# Altium PCB D23.PcbDoc
Units mm, origin at the board's own origin, x right, y up, seen from the top; angles counter-clockwise.
Board outline 105.92 x 67.69 mm, 2 copper layers (Top Layer, Bottom Layer); 23 components, 37 nets, 113 pads, 0 vias.
Unrouted connection lines stored in the file: 5.
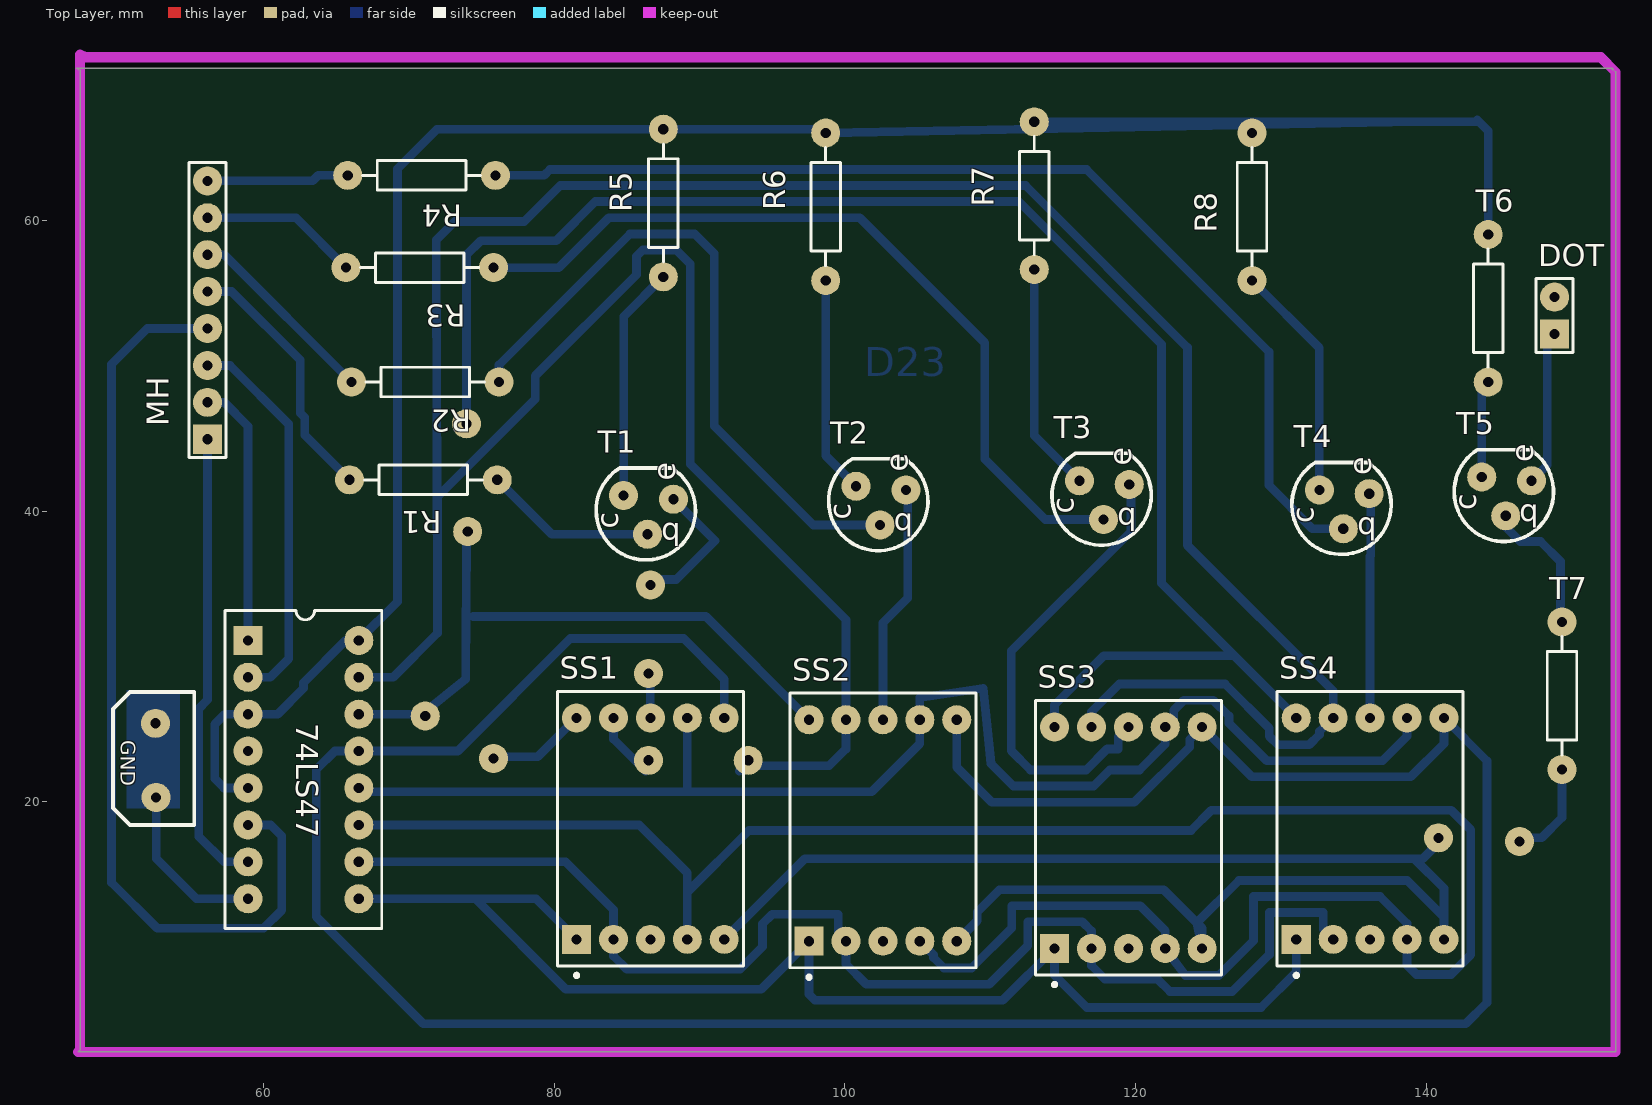
[diagram p0: Top Layer view]
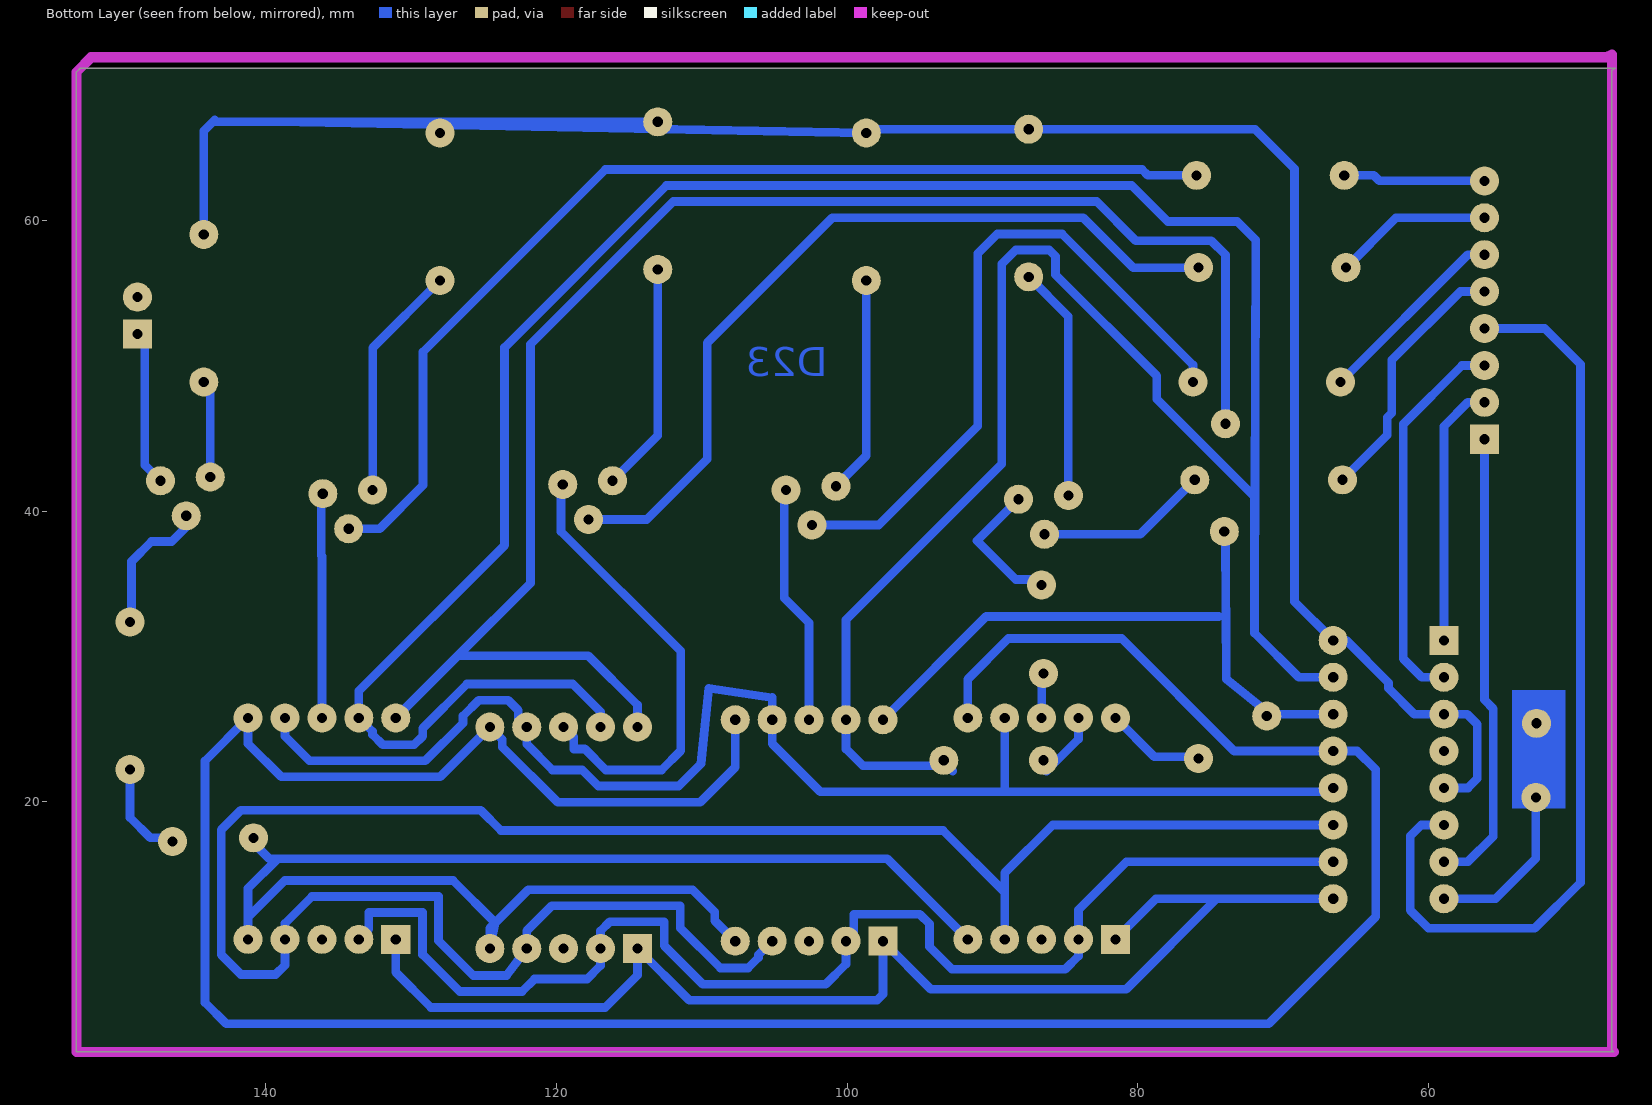
[diagram p1: Bottom Layer view, seen from below]

## Layer stack, top to bottom
Top Layer: signal copper 0.0356
Dielectric: dielectric 0.32, FR-4, Dk 4.8
Bottom Layer: signal copper 0.0356

## Board outline
47.371,70.358 47.371,2.921 47.244,2.794 153.035,2.794 153.035,70.231 152.781,70.485 47.117,70.485

## Design rules (kind name [scope] priority, off if disabled: settings)
Clearance [All] p1: gap=0.5
HoleSize [All] p1: absolutevalues=TRUE maxlimit=0.5 minlimit=0.5 maxpercent=80.000 minpercent=20.000
PolygonConnect [All] p1: connectstyle=Relief reliefconductorwidth=0.254 reliefentries=4 polygonreliefangle="90 Angle"
RoutingVias [All] p1: holewidth=0.711 width=1.27 viastyle="Through Hole" minholewidth=0.711 minwidth=1.27 maxholewidth=0.711 maxwidth=1.27
ShortCircuit [All] p1 off: allowed=FALSE
SilkscreenOverComponentPads [All] p1: minsilkscreentomaskgap=0.254
SolderMaskExpansion [All] p1: expansion=0.102
Width [All] p1: maxlimit=0.6 minlimit=0.6 preferedwidth=0.6
25 further rules are at their usual default settings.

## Components (designator, comment, footprint, x,y, rotation, side; value= is the part's Value field where it differs from the comment)
74LS47 "Comment" DIP-16-KEY 58.928,31.115 r270 top locked
DOT "Comment" HDR1X2 148.844,52.197 r90 top
MH "Comment" HDR1X8 56.134,44.958 r90 top
R1 "Comment" AXIAL-0.4#1 70.993,42.164 r180 top
R2 "Comment" AXIAL-0.4#1 71.12,48.895 r180 top
R3 "Comment" AXIAL-0.4#1 70.739,56.769 r180 top
R4 "Comment" AXIAL-0.4#1 70.866,63.119 r180 top
R5 "Comment" AXIAL-0.4#1 87.503,61.214 r90 top
R6 "Comment" AXIAL-0.4#1 98.679,60.96 r90 top
R7 "Comment" AXIAL-0.4#1 113.03,61.722 r90 top
R8 "Comment" AXIAL-0.4#1 128.016,60.96 r90 top
SS1 "" H 86.614,18.161 r0 top
SS2 "Comment" H 102.616,18.034 r0 top
SS3 "Comment" H 119.507,17.526 r0 top
SS4 "Comment" H 136.144,18.161 r0 top
T1 "Comment" "TO-92 Packaging" 86.487,39.751 r90 top
T2 "Comment" "TO-92 Packaging" 102.489,40.386 r90 top
T3 "Comment" "TO-92 Packaging" 117.856,40.767 r90 top
T4 "Comment" "TO-92 Packaging" 134.366,40.132 r90 top
T5 "Comment" "TO-92 Packaging" 145.542,41.021 r90 top
T6 "Comment" AXIAL-0.4#2 144.272,53.975 r90 top
T7 "Comment" AXIAL-0.4#2 149.352,27.305 r90 top
? "Comment" "PCB Block Connector" 52.578,22.86 r270 top

## Footprints (in the part's own frame and the unit in brackets; to place one, negate y for a bottom-side part, rotate by r counter-clockwise, add the part's x,y. Pads: shape width x height; smd on the part's side, far side on the other; paste and mask are expansions set on the pad)
AXIAL-0.4#1 [mm] "Axial Device, Thru-Hole; 2 Leads; 0.4 in Pin Spacing"
  round 2 hole 0.7: 2.1(-5.08,0) 2.1(5.08,0)
  silkscreen extent -4.06,-1.02 4.06,1.02
AXIAL-0.4#2 [mm] "Axial Device, Thru-Hole; 2 Leads; 0.4 in Pin Spacing"
  round 2 hole 0.7: 1(-5.08,0) 2(5.08,0)
  silkscreen extent -4.06,-1.02 4.06,1.02
DIP-16-KEY [mm] "DIP; 16 Leads; Row Spacing 7.62 mm; Pitch 2.54 mm"
  round 2 hole 0.7: 2.1(0,7.62) 2.1(2.54,7.62) 2.1(2.54,0) 2.1(5.08,7.62) 2.1(5.08,0) 2.1(7.62,7.62) 2.1(7.62,0) 2.1(10.16,7.62) 2.1(10.16,0) 2.1(12.7,7.62) 2.1(12.7,0) 2.1(15.24,0) 2.1(15.24,7.62) 2.1(17.78,0) 2.1(17.78,7.62)
  rect 2x2 hole 0.7: 2.1(0,0)
  silkscreen extent -2.05,-1.59 19.83,9.2
H [mm] "LED, 7-Segment Display, 14.2 mm, RHD; 10 Leads; Row Space 15.24 mm; Pitch 2.54 mm"
  rect 2x2 hole 0.7: 2.1(-5.08,-7.62)
  round 2 hole 0.7: 2.1(-5.08,7.62) 2.1(-2.54,-7.62) 2.1(-2.54,7.62) 2.1(0,-7.62) 2.1(0,7.62) 2.1(2.54,-7.62) 2.1(2.54,7.62) 2.1(5.08,-7.62) 2.1(5.08,7.62)
  silkscreen extent -6.4,-10.22 6.4,9.45, body extent -6.4,-9.45 6.4,9.45, height 8.25
HDR1X2 [mm] "Connector; Header; 2 Position"
  rect 2x2 hole 0.7: 1(0,0)
  round 2 hole 0.7: 2(2.54,0)
  silkscreen extent -1.27,-1.27 3.81,1.27
HDR1X8 [mm] "Connector; Header; 8 Position"
  rect 2x2 hole 0.7: 2.1(0,0)
  round 2 hole 0.7: 2.1(2.54,0) 2.1(5.08,0) 2.1(7.62,0) 2.1(10.16,0) 2.1(12.7,0) 2.1(15.24,0) 2.1(17.78,0)
  silkscreen extent -1.27,-1.27 19.05,1.27
"PCB Block Connector" [mm]
  round 2 hole 0.7: 2.1(-2.547,-0.023) 2.1(2.547,0.023)
  silkscreen extent -4.7,-2.94 4.44,2.65
"TO-92 Packaging" [mm] "for 2N3904"
  round 2 hole 0.7: T(-1.333,0.063) T(1.08,-1.714) T(1.333,1.714)
  silkscreen extent -3.1,-3.23 3.22,3.61

## Part data
MH: library part "Header 8"
R1 R2 R3 R4 R5 R6 R7 R8: library part Res2
SS1 SS2 SS3 SS4: library part "Dpy Blue-CA"

## Free pads (board coordinates)
  round 2 hole 0.7: 0(86.487,22.86) 0(140.843,17.526) 1(93.345,22.86) 1(146.431,17.272) 2(86.487,28.829) 3(86.614,34.925) 4(73.965,46.025) 5(74.041,38.608) 6(71.12,25.908) 7(75.819,22.987)

## Nets (pads, with @x,y where several pads share a name; then routed paths per layer and width w, separated by ;. In a path a pad name is that pad's centre, name@x,y a point inside that pad or via, vN(x,y) a via of type N, cw(c..) or ccw(c..) an arc to the next point about the centre after c; other vN are vias at no path point)
1: MH.2.1@56.134,55.118 R1.2.1@65.913,42.164 | length 18
  Bottom Layer w0.6: MH.2.1@56.134,55.118 57.81,55.118 62.517,50.412 62.517,46.76 62.822,46.455 62.822,45.255 R1.2.1@65.913,42.164
2: MH.2.1@56.134,57.658 R2.2.1@66.04,48.895 | length 13.5
  Bottom Layer w0.6: MH.2.1@56.134,57.658 57.277,57.658 R2.2.1@66.04,48.895
3: MH.2.1@56.134,60.198 R3.2.1@65.659,56.769 | length 10.9
  Bottom Layer w0.6: MH.2.1@56.134,60.198 62.23,60.198 R3.2.1@65.659,56.769
4: MH.2.1@56.134,62.738 R4.2.1@65.786,63.119 | length 9.8
  Bottom Layer w0.6: MH.2.1@56.134,62.738 63.373,62.738 63.754,63.119 R4.2.1@65.786,63.119
+5: 74LS47.2.1@58.928,20.955 74LS47.2.1@58.928,26.035 74LS47.2.1@66.548,31.115 R5.2.1@87.503,66.294 R6.2.1@98.679,66.04 R7.2.1@113.03,66.802 R8.2.1@128.016,66.04 T6.2 | length 162.5
  Bottom Layer w0.6: 74LS47.2.1@58.928,20.955 57.277,20.955 56.628,21.604 56.628,25.349 57.314,26.035 58.928,26.035 60.96,26.035 62.738,27.813 62.738,28.194 65.659,31.115 66.548,31.115 69.215,33.782 69.215,63.576 71.933,66.294 87.503,66.294 98.425,66.294 98.679,66.04 139.446,66.802 ; R7.2.1@113.03,66.802 127.254,66.802 139.446,66.802 ; 143.475,66.802 139.446,66.802 ; 143.51,66.929 144.272,66.167 T6.2
a: 74LS47.2.1@66.548,23.495 SS1.2.1@91.694,25.781 SS2.2.1@107.696,25.654 SS3.2.1@124.587,25.146 SS4.2.1@141.224,25.781 | length 195.2
  Bottom Layer w0.6: SS1.2.1@91.694,25.781 91.694,28.448 88.9,31.242 81.102,31.242 73.355,23.495 66.548,23.495 64.897,23.495 63.627,22.225 63.627,12.09 70.993,4.724 142.723,4.724 144.196,6.198 144.196,22.809 141.224,25.781 141.224,24.003 138.948,21.727 128.006,21.727 124.587,25.146 123.732,24.291 123.732,23.783 119.923,19.974 110.098,19.974 107.696,22.376 SS2.2.1@107.696,25.654
A1: 74LS47.2.1@58.928,31.115 MH.2.1@56.134,47.498 | length 18.2
  Bottom Layer w0.6: MH.2.1@56.134,47.498 57.277,47.498 58.928,45.847 74LS47.2.1@58.928,31.115
A2: 74LS47.2.1@58.928,28.575 MH.2.1@56.134,50.038 | length 26.7
  Bottom Layer w0.6: MH.2.1@56.134,50.038 57.683,50.038 61.722,45.999 61.722,29.845 60.452,28.575 74LS47.2.1@58.928,28.575
A3: 74LS47.2.1@58.928,18.415 MH.2.1@56.134,52.578 | length 64.5
  Bottom Layer w0.6: MH.2.1@56.134,52.578 51.994,52.578 49.53,50.114 49.53,14.453 52.68,11.303 59.995,11.303 61.239,12.548 61.239,17.653 60.477,18.415 74LS47.2.1@58.928,18.415
Ao: 74LS47.2.1@58.928,15.875 MH.2.1@56.134,44.958 | length 31.7
  Bottom Layer w0.6: MH.2.1@56.134,44.958 56.134,27.022 55.528,26.416 55.528,17.624 57.277,15.875 74LS47.2.1@58.928,15.875
b: 74LS47.2.1@66.548,20.955 SS1.2.1@89.154,25.781 SS2.2.1@105.156,25.654 SS3.2.1@122.047,25.146 SS4.2.1@138.684,25.781 | length 95
  Bottom Layer w0.6: 74LS47.2.1@66.548,20.955 66.802,20.701 89.154,20.701 ; SS1.2.1@89.154,25.781 89.154,20.701 ; SS4.2.1@138.684,25.781 138.684,24.511 137,22.827 129.032,22.827 126.437,25.422 126.437,25.912 125.349,27 123.317,27 122.631,26.314 122.631,25.146 122.047,25.146 122.047,23.978 120.269,22.2 118.237,22.2 117.133,21.096 111.582,21.096 110.058,22.62 109.525,27.813 105.156,27.178 105.156,25.654 105.156,24.003 101.854,20.701 89.154,20.701
B1: R1.2.1@76.073,42.164 T1.T@86.423,38.417 | length 11.9
  Bottom Layer w0.6: R1.2.1@76.073,42.164 79.819,38.417 T1.T@86.423,38.417
B2: R2.2.1@76.2,48.895 T2.T@102.425,39.052 | length 46.4
  Bottom Layer w0.6: R2.2.1@76.2,48.895 76.2,50.067 85.217,59.084 89.662,59.084 91.008,57.738 91.008,45.872 97.828,39.052 T2.T@102.425,39.052
B3: R3.2.1@75.819,56.769 T3.T@117.792,39.433 | length 56.7
  Bottom Layer w0.6: R3.2.1@75.819,56.769 80.315,56.769 83.744,60.198 101.016,60.198 109.626,51.587 109.626,43.599 113.792,39.433 T3.T@117.792,39.433
B4: R4.2.1@75.946,63.119 T4.T@134.302,38.798 | length 74.1
  Bottom Layer w0.6: R4.2.1@75.946,63.119 79.309,63.119 79.705,63.516 116.627,63.516 129.184,50.958 129.184,41.783 132.169,38.798 T4.T@134.302,38.798
B5: T5.T@143.827,42.355 T6.1 | length 6.1
  Bottom Layer w0.6: T5.T@143.827,42.355 T6.1@143.827,48.45
c: 74LS47.2.1@66.548,18.415 SS1.2.1@89.154,10.541 SS2.2.1@105.156,10.414 SS3.2.1@122.047,9.906 SS4.2.1@138.684,10.541 | length 146.8
  Bottom Layer w0.6: 74LS47.2.1@66.548,18.415 85.852,18.415 89.154,15.113 89.154,13.792 ; SS1.2.1@89.154,10.541 89.154,13.792 ; SS2.2.1@105.156,10.414 106.098,9.472 106.098,9.293 106.826,8.564 108.716,8.564 111.477,11.325 111.477,12.856 120.316,12.856 122.047,11.125 122.047,9.906 123.444,8.052 125.73,8.052 128.114,10.436 128.114,13.491 136.826,13.491 138.684,11.633 138.684,10.541 138.684,8.763 139.319,8.128 141.732,8.128 143.078,9.474 143.078,18.085 141.732,19.431 125.222,19.431 123.825,18.034 93.396,18.034 89.154,13.792
C1: R5.2.1@87.503,56.134 T1.T@84.772,41.084 | length 16.2
  Bottom Layer w0.6: T1.T@84.772,41.084 84.772,53.404 R5.2.1@87.503,56.134
C2: R6.2.1@98.679,55.88 T2.T@100.774,41.719 | length 15
  Bottom Layer w0.6: R6.2.1@98.679,55.88 98.679,43.815 T2.T@100.774,41.719
C3: R7.2.1@113.03,56.642 T3.T@116.141,42.1 | length 15.8
  Bottom Layer w0.6: R7.2.1@113.03,56.642 113.03,45.212 T3.T@116.141,42.1
C4: R8.2.1@128.016,55.88 T4.T@132.651,41.465 | length 16.3
  Bottom Layer w0.6: R8.2.1@128.016,55.88 132.651,51.244 T4.T@132.651,41.465
C5: 
CA1: pad.2 pad.3 SS1.2.1@86.614,25.781 T1.T@88.201,40.831 | length 11.5
  Bottom Layer w0.6: SS1.2.1@86.614,25.781 pad.2@86.614,27.94 ; pad.3@86.868,35.306 88.392,35.306 91.059,37.973 T1.T@88.201,40.831
CA2: SS2.2.1@102.616,25.654 T2.T@104.203,41.465 | length 16.6
  Bottom Layer w0.6: SS2.2.1@102.616,25.654 102.616,32.334 104.318,34.036 104.318,41.351 T2.T@104.203,41.465
CA3: SS3.2.1@119.507,25.146 T3.T@119.57,41.846 | length 32.1
  Bottom Layer w0.6: SS3.2.1@119.507,25.146 118.821,24.46 118.821,23.647 118.059,23.647 116.608,22.196 112.78,22.196 111.455,23.52 111.455,30.378 119.685,38.608 119.685,41.846 T3.T@119.57,41.846
CA4: SS4.2.1@136.144,25.781 T4.T@136.081,41.212 | length 15.6
  Bottom Layer w0.6: T4.T@136.081,41.212 136.081,40.665 136.195,40.665 136.195,36.957 136.144,36.906 SS4.2.1@136.144,25.781
d: 74LS47.2.1@66.548,15.875 SS1.2.1@84.074,10.541 SS2.2.1@100.076,10.414 SS3.2.1@116.967,9.906 SS4.2.1@133.604,10.541 | length 89.7
  Bottom Layer w0.6: 74LS47.2.1@66.548,15.875 80.772,15.875 84.074,12.573 84.074,10.541 84.074,9.398 84.988,8.484 92.786,8.484 94.336,10.033 94.336,11.608 94.996,12.268 99.543,12.268 99.543,10.947 100.076,10.414 100.076,8.842 101.461,7.457 109.924,7.457 112.577,10.11 112.577,11.756 116.332,11.756 116.967,11.121 116.967,9.906 116.967,8.742 117.905,7.804 121.515,7.804 122.367,6.952 126.666,6.952 129.214,9.5 129.214,12.391 132.914,12.391 132.914,11.231 SS4.2.1@133.604,10.541
dot: 
e: 74LS47.2.1@66.548,13.335 SS1.2.1@81.534,10.541 SS2.2.1@97.536,10.414 SS3.2.1@114.427,9.906 SS4.2.1@131.064,10.541 | length 87.9
  Bottom Layer w0.6: 74LS47.2.1@66.548,13.335 74.574,13.335 ; SS1.2.1@81.534,10.541 78.74,13.335 74.574,13.335 ; SS4.2.1@131.064,10.541 131.064,8.275 128.641,5.852 116.64,5.852 114.427,8.065 114.427,9.906 110.871,6.35 97.942,6.35 97.536,6.756 97.536,10.414 94.234,7.112 80.797,7.112 74.574,13.335
E5: pad.0@140.843,17.526 pad.1@146.431,17.272 SS1.2.1@91.694,10.541 SS2.2.1@107.696,10.414 SS3.2.1@124.587,9.906 SS4.2.1@141.224,10.541 T7.1 | length 107.1
  Bottom Layer w0.6: SS1.2.1@91.694,10.541 97.231,16.078 139.192,16.078 ; SS2.2.1@107.696,10.414 109.109,11.827 109.109,12.425 110.64,13.956 121.934,13.956 124.213,11.677 ; pad.0@140.843,17.145 139.776,16.078 139.192,16.078 ; SS4.2.1@141.224,10.541 141.224,12.065 ; pad.1@146.558,17.653 146.685,17.526 147.955,17.526 149.352,18.923 T7.1@149.352,22.098 ; 124.213,11.677 124.587,11.303 124.587,9.906 124.213,11.677 ; 124.213,11.677 127.127,14.591 138.698,14.591 141.224,12.065 ; 139.192,16.078 141.224,14.046 141.224,12.065
f: 74LS47.2.1@66.548,28.575 pad.0@86.487,22.86 pad.1@93.345,22.86 SS1.2.1@84.074,25.781 SS2.2.1@100.076,25.654 SS3.2.1@116.967,25.146 SS4.2.1@133.604,25.781 | length 228.9
  Bottom Layer w0.6: 74LS47.2.1@66.548,28.575 68.91,28.575 71.958,31.623 ; SS1.2.1@84.074,25.781 84.074,24.333 pad.0@86.284,22.123 ; pad.1@92.735,22.123 93.091,22.479 98.908,22.479 100.076,23.647 100.076,25.654 100.076,32.537 89.357,43.256 89.357,57.023 88.396,57.984 86.081,57.984 85.653,57.556 85.653,56.286 78.689,49.323 78.689,47.727 71.958,40.996 71.958,31.623 ; SS3.2.1@116.967,25.146 116.967,26.213 118.872,28.118 126.153,28.118 129.21,25.061 129.21,24.523 129.806,23.927 131.955,23.927 132.666,24.638 132.666,24.843 133.604,25.781 133.604,27.635 123.571,37.668 123.571,51.27 112.425,62.416 80.409,62.416 77.937,59.944 73.152,59.944 71.882,58.674 71.958,31.623
g: 74LS47.2.1@66.548,26.035 pad.4 pad.5 pad.6 pad.7 SS1.2.1@81.534,25.781 SS2.2.1@97.536,25.654 SS3.2.1@114.427,25.146 SS4.2.1@131.064,25.781 | length 160.6
  Bottom Layer w0.6: 74LS47.2.1@66.548,26.035 70.917,26.035 73.914,28.448 pad.5@73.965,38.303 ; pad.4 73.965,57.658 74.93,58.623 80.137,58.623 82.829,61.316 111.963,61.316 121.793,51.486 121.793,35.052 126.796,30.049 ; 74.422,32.766 90.424,32.766 SS2.2.1@97.536,25.654 ; pad.7@76.073,23.114 78.867,23.114 SS1.2.1@81.534,25.781 ; SS3.2.1@114.427,25.146 114.427,26.663 117.813,30.049 126.796,30.049 ; SS4.2.1@131.064,25.781 126.796,30.049
GRND: 74LS47.2.1@58.928,13.335 ?.2.1 | length 16.8
  Bottom Layer w0.6: ?.2.1@52.555,25.407 52.555,22.88 52.601,22.835 52.601,20.313 52.601,16.106 55.372,13.335 74LS47.2.1@58.928,13.335
LT: T7.2 | length 9.4
  Bottom Layer w0.6: 145.097,39.306 146.479,37.925 147.876,37.925 149.241,36.56 T7.2@149.241,32.401
RBC: 74LS47.2.1@58.928,23.495
RBI: 
Vcc: 
pads on no net: DOT.1 DOT.2 SS1.2.1@86.614,10.541 SS2.2.1@102.616,10.414 SS3.2.1@119.507,9.906 SS4.2.1@136.144,10.541 T5.T@145.478,39.688 T5.T@147.256,42.1
copper on no net: | length 10.7
  Bottom Layer w0.6: 147.256,42.1 148.336,43.18 148.336,45.72 ; 148.336,46.355 148.336,45.72 ; 148.336,51.689 148.336,45.72

## Keep-outs
Keep-Out Layer:
  lines w0.7: 47.244,2.794 47.371,2.921 47.371,71.438 47.752,71.247 152.019,71.247 153.035,70.231 153.035,2.794 47.244,2.794

## Other copper
Bottom Layer:
  rectangle net GRND: 50.546,19.558 54.229,27.686
  text "D23" at 101.346,49.276 h2

## Text inside footprints (layer, text, board x,y; h text height)
T1: Top Overlay "c" at 84.391,38.798 h1.5 r90; Top Overlay "e" at 88.328,42.1 h1.5 r90; Top Overlay "b" at 88.709,39.179 h1.52 r180
T2: Top Overlay "c" at 100.393,39.433 h1.5 r90; Top Overlay "e" at 104.331,42.735 h1.5 r90; Top Overlay "b" at 104.712,39.814 h1.52 r180
T3: Top Overlay "c" at 115.76,39.814 h1.5 r90; Top Overlay "e" at 119.697,43.116 h1.5 r90; Top Overlay "b" at 120.078,40.195 h1.52 r180
T4: Top Overlay "c" at 132.27,39.179 h1.5 r90; Top Overlay "e" at 136.207,42.481 h1.5 r90; Top Overlay "b" at 136.588,39.56 h1.52 r180
T5: Top Overlay "b" at 147.764,40.45 h1.52 r180; Top Overlay "e" at 147.383,43.37 h1.5 r90; Top Overlay "c" at 143.446,40.069 h1.5 r90
?: Top Overlay "GND" at 50.165,24.257 h1.02 r270